# EAGLE board SwitchUp (EAGLE 9.1.3)
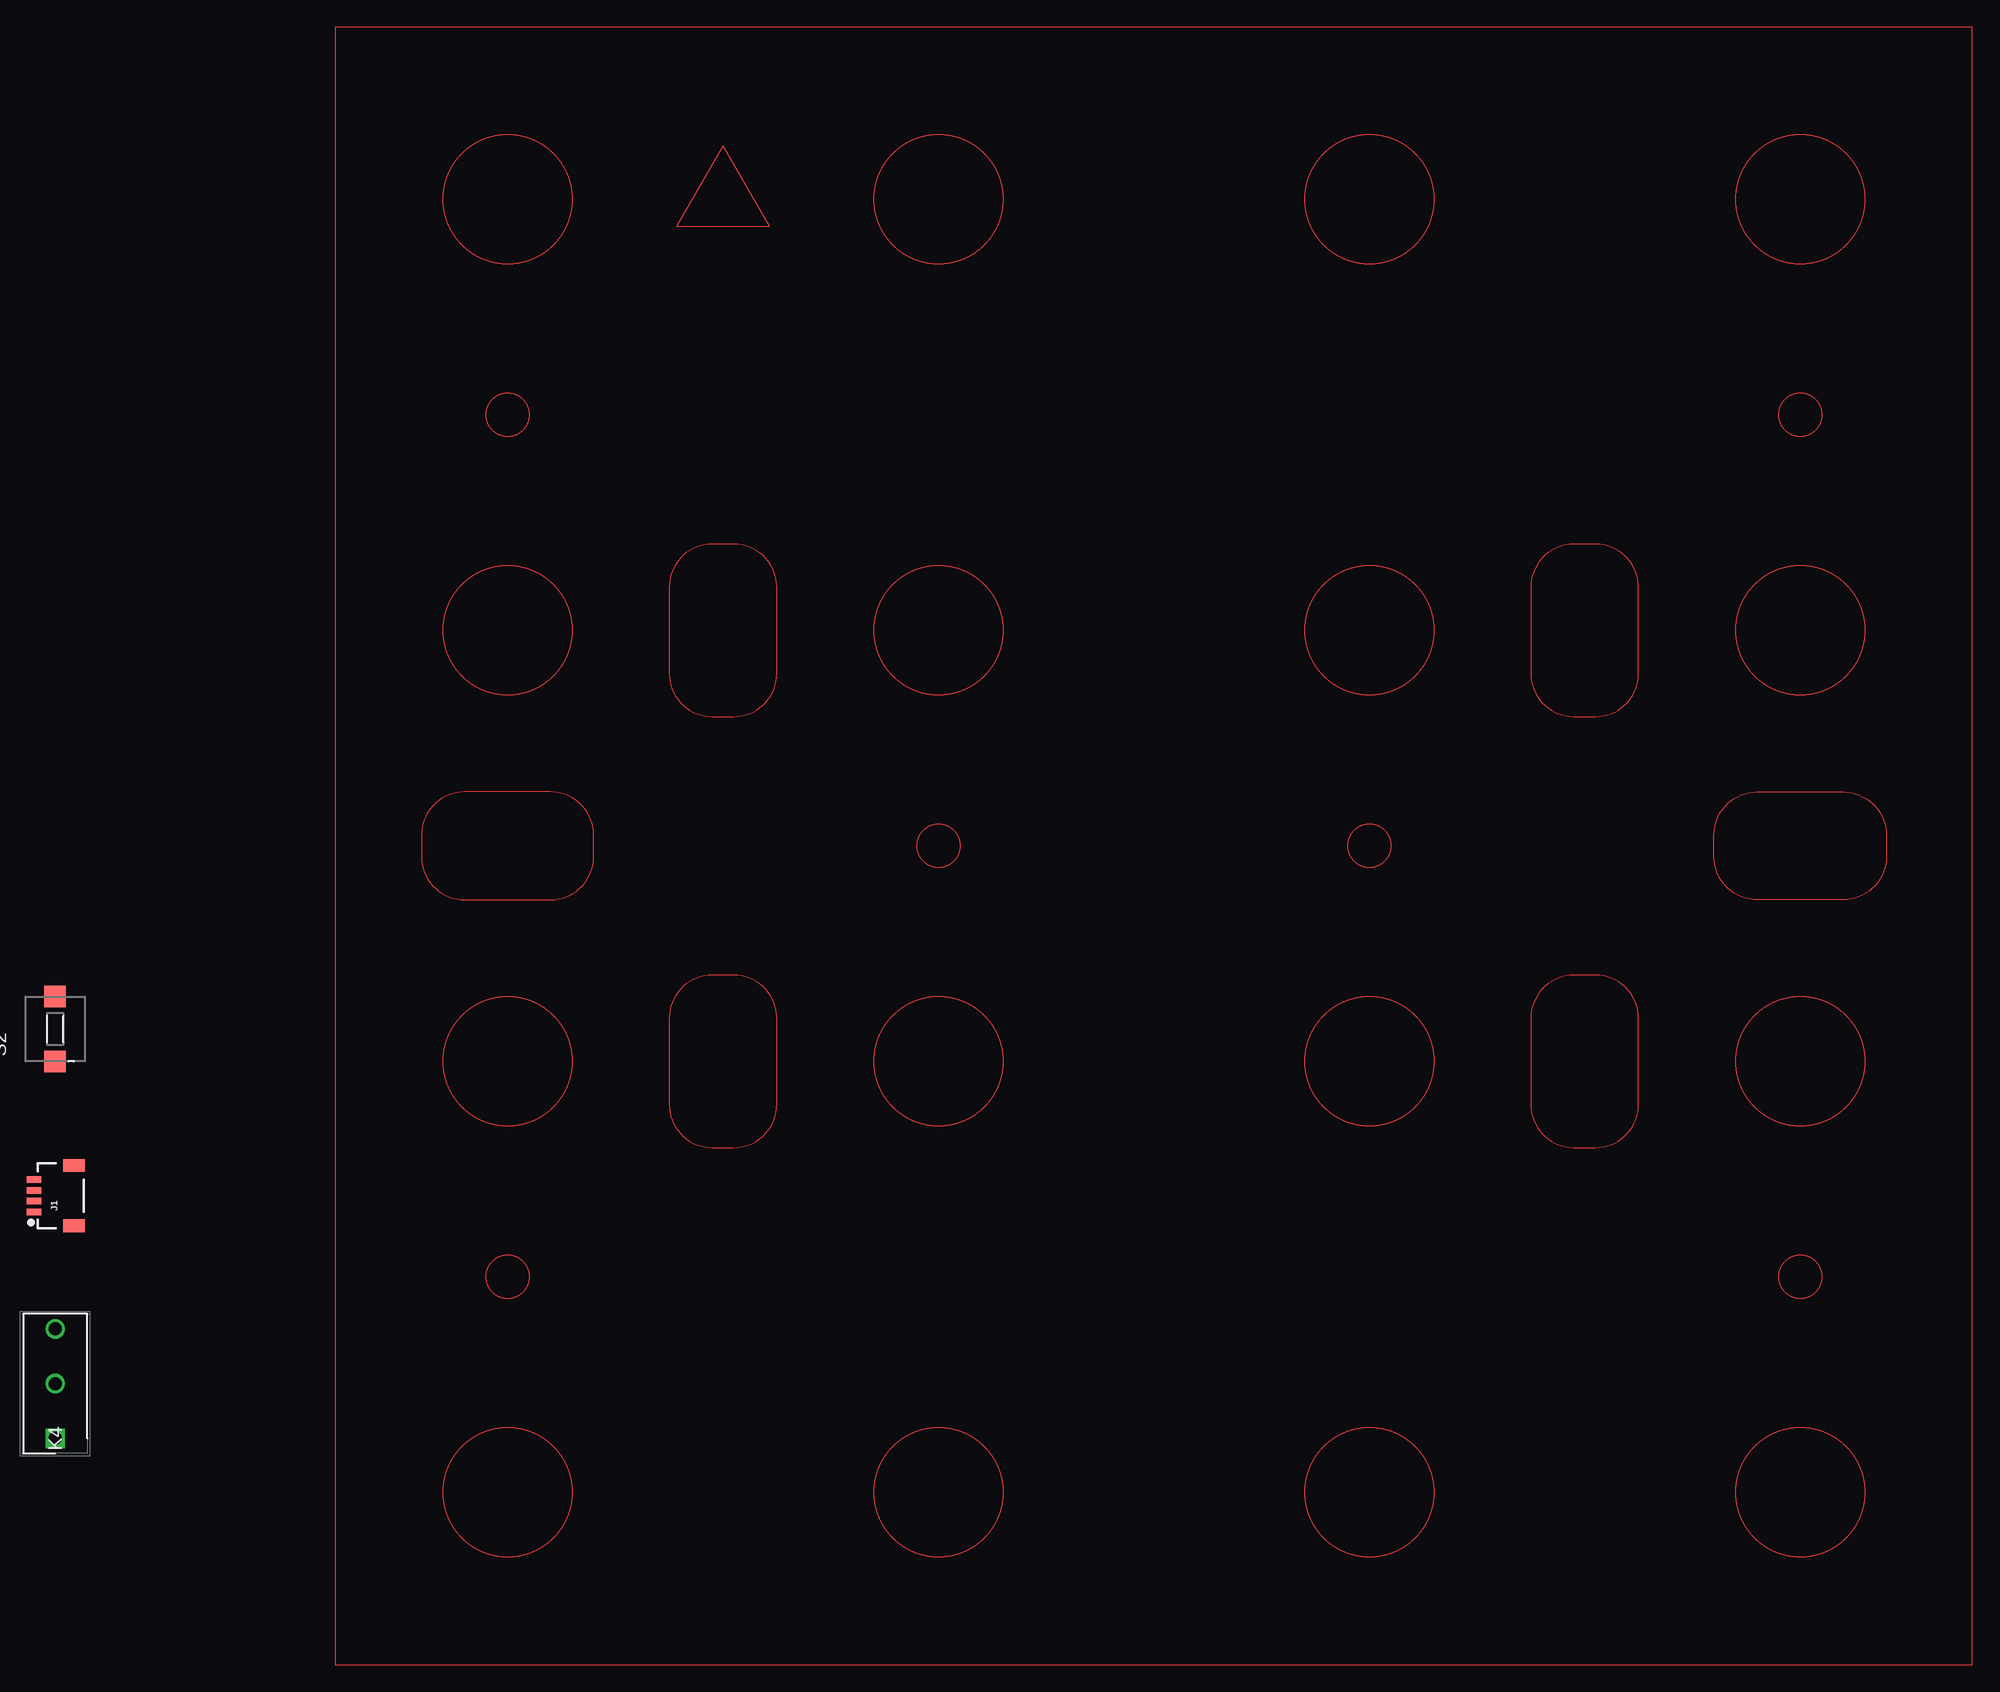
[diagram p0: board, top side]

No outline drawn. Coordinates in mm, seen from the top.
Copper layers (1*16): Top 0.035mm / dielectric 1.5mm / Bottom 0.035mm
Design rules "default": minimum track width 6mil, minimum drill 0.35mm, track to track 6mil, track to pad 6mil, pad to pad 6mil, via to via 6mil, smd to smd 6mil, copper to edge 40mil, drill to drill 6mil, minimum pad ring 10mil, minimum via ring 8mil, stop-mask expansion 4mil, vias tented up to drill 0mil, thermal gap 10mil

## Footprints (pad centres in the part's own frame; a part is rotated, then mirrored left to right if it is on the bottom)
1X04_1MM_RA = smd 0.6 x 1.35: 1 -1.5,0; 2 -0.5,0; 3 0.5,0; 4 1.5,0 | smd 1.2 x 2: NC1 2.8,-3.675; NC2 -2.8,-3.675
SHDR3W100P0X508_1X3_1280X580X5 = drill 1.2 pad 1.8 square: 1 0,0 | drill 1.2 pad 1.8: 2 5.08,0; 3 10.16,0
DTSM-3 = smd 2 x 2: 1 -3,0; 2 3,0

## Placement (x,y rotation side)
J1  [1X04_1MM_RA]  -27.95,43.53 90 top
K4  D2F-5  [SHDR3W100P0X508_1X3_1280X580X5]  -26,21 90 top
S2  DTSM-3  [DTSM-3]  -26,59 90 top

## Library data of the parts
J1 = SparkFun-Connectors
K4 = D2F-5; ALLIED_NUMBER: 71203873; ALLIED_PRICE-STOCK: https://www.alliedelec.com/omron-electronic-components-d2f-5/71203873/; DESCRIPTION: OMRON ELECTRONIC COMPONENTS - D2F-5 - MICROSWITCH, PLUNGER, SPDT, 5A, 250V, TH; HEIGHT: 5.8mm; MANUFACTURER_NAME: Omron Electronics; MANUFACTURER_PART_NUMBER: D2F-5; MOUSER_PART_NUMBER: 653-D2F-5; MOUSER_PRICE-STOCK: https://www.mouser.com/Search/Refine.aspx?Keyword=653-D2F-5
S2 = switch-tact

## Nets
N$10: J1.4
N$11: J1.3
N$12: J1.2
N$13: J1.1

## Tracks (layer width: path | path; a pad name or v marks a point on that pad's centre or on a via)
N$2
  Top 0.01: 0,0 152,0 152,152 0,152 0,0
N$3
  Top 0.01: 12,71 20,71 arc90 24,75 24,77 arc90 20,81 12,81 arc90 8,77 8,75 arc90 12,71
N$4
  Top 0.01: 140,71 132,71 arc-90 128,75 128,77 arc-90 132,81 140,81 arc-90 144,77 144,75 arc-90 140,71
N$5
  Top 0.01: 31,100 31,92 arc90 35,88 37,88 arc90 41,92 41,100 arc90 37,104 35,104 arc90 31,100
N$6
  Top 0.01: 111,100 111,92 arc90 115,88 117,88 arc90 121,92 121,100 arc90 117,104 115,104 arc90 111,100
N$7
  Top 0.01: 31,60 31,52 arc90 35,48 37,48 arc90 41,52 41,60 arc90 37,64 35,64 arc90 31,60
N$8
  Top 0.01: 111,60 111,52 arc90 115,48 117,48 arc90 121,52 121,60 arc90 117,64 115,64 arc90 111,60
N$9
  Top 0.01: 36,141 31.67,133.5 40.33,133.5 36,141
(copper drawn outside any net)
  shapes: Top circle x22